# Altium PCB PCB1.PcbDoc (part 3 of 3)
Units mil, origin at the board's own origin, x right, y up, seen from the top; angles counter-clockwise.
Board outline 4173.23 x 3149.71 mil, 2 copper layers (Top Layer, Bottom Layer); 88 components, 73 nets, 388 pads, 166 vias.
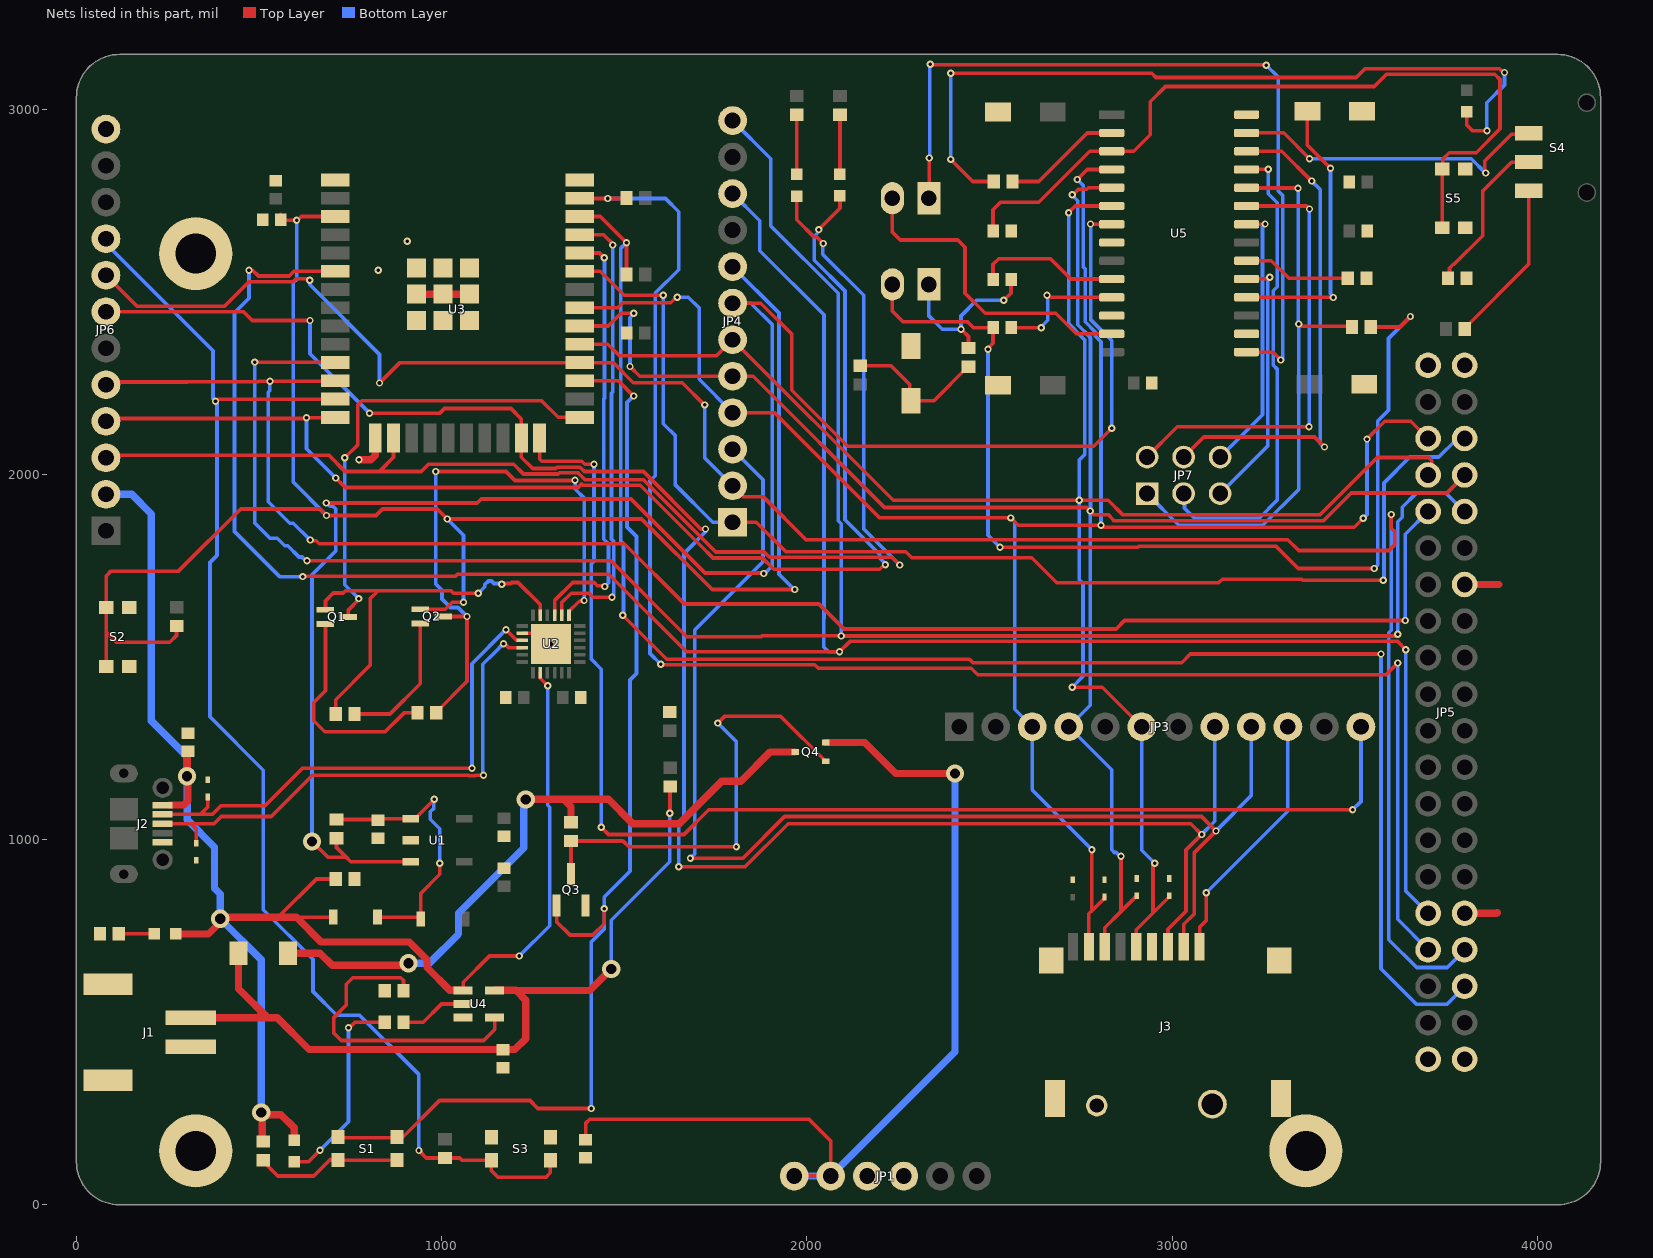
[diagram p2: the nets of this part, all layers, seen from the top]

## Via types
v1: diameter 20, hole 10, Top Layer to Bottom Layer, 146 vias
v2: diameter 50, hole 28, Top Layer to Bottom Layer, 20 vias

## Nets (pads, with @x,y where several pads share a name; then routed paths per layer and width w, separated by ;. In a path a pad name is that pad's centre, name@x,y a point inside that pad or via, vN(x,y) a via of type N, cw(c..) or ccw(c..) an arc to the next point about the centre after c; other vN are vias at no path point) (continued)
CD/DAT3: J3.2 JP3.9 JP4.3 | length 3418.3
  Top Layer w10: v1(1681.1,948.82) 1824.8,948.82 1938.98,1062.99 3080.71,1062.99 v1(3120.08,1023.62) 3061.02,964.57 3061.02,797.24 3031.89,768.11 J3.2@3031.89,706.73
  Bottom Layer w10: v1(1681.1,948.82) 1692.91,960.63 1692.91,1573.47 1880,1760.56 1880,1985.29 JP4.3@1796.63,2068.66 ; v1(3120.08,1023.62) 3216.93,1120.47 JP3.9@3216.93,1309.06
CMD: J3.3 JP3.8 JP6.7 U3.23 | length 5118.5
  Top Layer w10: JP6.7@81.02,2445.2 457.72,2445.2 481.66,2421.26 v1(639.76,2421.26) ; v1(802.6,2167.6) 995.51,2167.6 1007.91,2180 1190,2180 1218.31,2151.69 U3.23@1218.31,2099.17 1218.31,2046.69 1249.25,2015.75 1312.78,2015.75 1315.97,2018.94 1379.5,2018.94 1390.88,2007.56 1552.44,2007.56 1709.61,1850.39 v1(1722.44,1850.39) ; v1(1649.6,925.2) 1830.71,925.2 1948.82,1043.31 3051.18,1043.31 v1(3080.71,1013.78) 3038.19,971.26 3038.19,803.94 2988.58,754.33 J3.3@2988.58,706.73
  Bottom Layer w10: v1(639.76,2421.26) 639.76,2330.44 v1(802.6,2167.6) ; v1(1649.6,925.2) 1649.6,1040.71 1663.39,1054.49 1663.39,1783.39 1722.44,1842.44 v1(1722.44,1850.39) ; v1(3080.71,1013.78) 3116.93,1050 JP3.8@3116.93,1309.06
CTP_/WAKE: JP4.10 JP5.32 U3.6 | length 6513.2
  Top Layer w10: v1(472.44,2559.06) 482.28,2559.06 498.49,2542.84 582.51,2542.84 595.58,2555.91 U3.6@708.66,2555.91 ; v1(620,1720) 621.37,1721.37 1038.39,1721.37 1043.39,1726.37 1457.69,1726.37 1670.14,1513.93 2085.15,1513.93 2089.48,1509.6 v1(2089.48,1513.93) 2118.08,1542.53 3617.47,1542.53 v1(3640,1520)
  Bottom Layer w10: v1(472.44,2559.06) 472.44,2482.06 433.07,2442.69 433.07,1843.3 556.37,1720 v1(620,1720) ; JP4.10@1796.63,2768.66 1871.06,2694.23 1871.06,2612.43 2046.92,2436.57 2046.92,1606.18 2046.06,1605.31 2046.06,1527.16 2059.28,1513.93 v1(2089.48,1513.93) ; v1(3640,1520) 3640,859.03 JP5.32@3700.79,798.24 ; JP5.32@3700.79,797.24 3704.77,801.23 JP5.32@3704.77,811.07
CTP_INT: JP4.2 JP5.33 JP6.8 U3.28 | length 5609.6
  Top Layer w10: JP6.8@81.02,2545.2 166.02,2460.2 405.7,2460.2 472.62,2527.13 593.06,2527.13 600.94,2535 612.5,2535 612.56,2535.06 635.14,2535.06 v1(638.55,2531.65) ; v1(830,2250) 885.91,2305.91 1469.68,2305.91 1524.53,2251.06 1658.94,2251.06 v1(1720,2190) ; JP4.2@1796.63,1968.66 1826.31,1938.98 1879.92,1938.98 1998.43,1820.47 3310.43,1820.47 ; 3307.09,1820.87 3316.93,1820.87 3346.46,1791.34 3593.68,1791.34 3610,1807.65 3610,1842.47 3600,1852.47 v1(3600,1890)
  Bottom Layer w10: v1(638.55,2531.65) 638.55,2519.65 830,2328.2 v1(830,2250) ; v1(1720,2190) 1720,2045.29 JP4.2@1796.63,1968.66 ; v1(3600,1890) 3600,1572.98 3593.34,1566.32 3593.34,725.91 3669.64,649.61 3753.15,649.61 JP5.33@3800.79,697.24
DTR: Q1.2 R8.2 U2.23 | length 1090.6
  Top Layer w10: Q1.2@681.21,1629.41 681.84,1630.04 681.84,1653.45 703.39,1675 730.12,1675 736.49,1681.37 1025.58,1681.37 1032.96,1674 v1(1100,1674) ; R8.2@710.01,1343.8 710.01,1383.05 804.1,1477.14 804.1,1659.1 826.17,1681.17 ; v1(1165,1699) 1166.91,1700.91 1189.62,1700.91 1192.71,1704 1209.39,1704 1269.92,1643.47 U2.23@1269.92,1613.93
  Bottom Layer w10: v1(1100,1674) 1118.21,1692.21 1118.21,1698.21 1128.09,1708.09 1136.37,1708.09 1143.55,1700.91 1163.09,1700.91 v1(1165,1699)
EN: JP4.7 R3.1 U1.3 U5.7 | length 5394.5
  Top Layer w10: v2(645,995) 688,952 738,952 ; v1(683.95,1921.5) 1097.22,1921.5 1108.11,1932.39 1518.68,1932.39 1721.07,1730 1880.24,1730 v1(1881.89,1728.35) ; R3.1@711.98,1007.55 711.98,978.02 738,952 ; U1.3@915.3,939.14 750.86,939.14 738,952 ; JP4.7@1796.63,2468.66 1873.86,2468.66 1958.41,2384.11 1958.41,2230.06 2111.7,2076.77 2785.43,2076.77 v1(2834.65,2125.98) ; v1(2776.7,2685.24) 2776.99,2684.94 2834.35,2684.94 U5.7@2834.65,2684.65
  Bottom Layer w10: v2(645,995) 645,1725 710,1790 710,1905.12 702.93,1912.19 695.96,1912.19 686.66,1921.5 v1(683.95,1921.5) ; JP4.7@1796.63,2468.66 1846.34,2468.66 1905,2410 1905,1748.75 1884.6,1728.35 v1(1881.89,1728.35) ; v1(2776.7,2685.24) 2776.81,2685.12 2776.81,2423.98 2834.65,2366.14 v1(2834.65,2125.98)
ERASE: JP7.3 U5.25 | length 1310.3
  Top Layer w10: U5.25@3203.94,2834.65 3204.15,2834.86 3262.89,2834.86 v1(3263.11,2835.08)
  Bottom Layer w10: JP7.3@3031.5,1947.24 3033.98,1944.76 3033.98,1906.97 3061.02,1879.92 3238.19,1879.92 3287.4,1929.13 3287.4,2288.49 3277.24,2298.66 3277.24,2502.94 3287.71,2513.42 3287.71,2743.88 3263.11,2768.49 v1(3263.11,2835.08)
FT: JP7.6 U5.22 | length 740
  Top Layer w10: U5.22@3203.94,2684.65 3204.31,2685.02 3254.14,2685.02 v1(3254.51,2685.39)
  Bottom Layer w10: JP7.6@3131.5,2047.24 3247.24,2162.99 3247.24,2678.12 v1(3254.51,2685.39)
FWD: JP7.4 U5.26 | length 1376.4
  Top Layer w10: JP7.4@3031.5,2047.24 3086.61,2102.36 3389.76,2102.36 v1(3417.32,2074.8) ; U5.26@3203.94,2884.65 3300.39,2884.65 v1(3381.89,2803.15)
  Bottom Layer w10: v1(3381.89,2803.15) 3405.51,2779.53 3405.51,2083.91 3414.62,2074.8 v1(3417.32,2074.8)
GND: C1.1 C2.1 C3.1 C4.1 C5.1 C6.1 C7.1 C8.1 C9.1 C10.1 C11.1 C12.2 C15.2 C16.1 C17.2 C18.1 C19.2 C20.1 C21.2 C22.1 CR1.1 CR2.1 CR3.1 CR4.1 CR5.1 CR6.1 J1.2 J1.3 J1.4 J2.5 J3.4 J3.10 J3.11 J3.12 J3.13 J3.14 J3.15 JP1.3 JP1.4 JP5.1 JP5.2 JP5.13 JP5.31 JP5.39 JP5.40 JP6.12 MTH1.1 MTH2.1 MTH3.1 Q3.2 R2.1 R4.2 R5.1 R9.2 R20.1 R22.1 S2.1 S2.2 S3.3 S3.4 S5.3 S5.4 U1.2 U2.2 U2.25 U3.1 U3.15 U3.38 U3.39 U3.40 U3.41 U3.42 U3.43 U3.44 U3.45 U3.46 U3.47 U4.3 U5.8 U5.12 U5.16 U5.28 | length 516.3
  Top Layer w10: U2.2@1220.95,1564.97 1269.92,1564.97 v1(1299.45,1535.43)
  Top Layer w20: v1(773.63,2039.81) 806.34,2039.81 818.31,2051.77 U3.15@818.31,2099.17 ; U3.42@931.52,2493.15 U3.43@1003.77,2493.15 U3.44@1076.01,2493.15 ; JP5.31@3800.79,798.24 3888.24,798.24 3890,800 ; JP5.13@3800.79,1698.24 3894.91,1698.24
  other v1: 826.77,2559.06 905.51,2637.8
GPIO0: Q1.3 U3.25 | length 1261.8
  Top Layer w10: v1(735,2045) 770,2080 770,2190 781.54,2201.54 1273.68,2201.54 1319.31,2155.91 U3.25@1377.95,2155.91 ; Q1.3@744.21,1609.72 Q1.3@744.74,1609.72 ; Q1.3@752.21,1609.72 Q1.3@744.74,1609.72 ; v1(772.96,1659.74) 772.96,1657.04 744.74,1628.82 Q1.3@744.74,1609.72
  Bottom Layer w10: v1(735,2045) 735,1697.7 v1(772.96,1659.74)
GPIO2: JP3.12 U3.24 | length 3551.1
  Top Layer w10: U3.24@1268.31,2099.17 1268.31,2041.58 1274.17,2035.72 1383.93,2035.72 1392.09,2027.56 v1(1417.32,2027.56) ; v1(1437.01,1033.46) 1456.69,1013.78 1663.39,1013.78 1730.98,1081.37 v1(3494.09,1081.37)
  Bottom Layer w10: v1(1417.32,2027.56) 1417.32,1762.82 1410,1755.49 1410,1493.46 1437.01,1466.45 v1(1437.01,1033.46) ; v1(3494.09,1081.37) 3516.93,1104.21 JP3.12@3516.93,1309.06
INT: JP5.10 JP6.5 U3.12 | length 4545.7
  Top Layer w10: JP6.5@81.02,2245.2 88.45,2252.64 303.07,2252.64 304.25,2253.82 498.82,2253.82 500,2255 v1(530,2255) U3.12@698.94,2255 ; v1(640,1820) 641.91,1818.09 656.61,1818.09 664.7,1810 1500,1810 1665,1645 2033.12,1645 2101.6,1576.52 2846.77,1576.52 2869.87,1599.62 v1(3638.14,1599.62)
  Bottom Layer w10: v1(530,2255) 528.94,2253.94 528.94,2228.94 525,2225 525,1925 584.04,1865.96 594.04,1865.96 v1(640,1820) ; v1(3638.14,1599.62) 3638.14,1835.6 JP5.10@3700.79,1898.24
INT_READY: S4.3 U5.27 | length 877.2
  Top Layer w10: U5.27@3203.94,2934.65 3204.11,2934.82 3305.33,2934.82 v1(3375.98,2864.17) ; v1(3858.27,2824.8) 3856.35,2826.72 3856.35,2858.49 3929.3,2931.44 S4.3@3966.87,2931.44
  Bottom Layer w10: v1(3375.98,2864.17) 3818.9,2864.17 v1(3858.27,2824.8) v1@3860.24,2824.8
IO14_SW2: JP6.9 R13.1 S3.1 S3.2 U3.13 | length 3678.1
  Top Layer w10: v1(381.06,2200) 383.77,2200 389.68,2205.91 U3.13@708.66,2205.91 ; v1(937.79,148.56) 958.17,128.18 1048.98,128.18 1055.49,121.68 S3.2@1136.08,121.68 1136.08,93.92 1155,75 1285,75 1297.49,87.49 S3.1@1297.49,121.68
  Bottom Layer w10: JP6.9@81.02,2645.2 81.02,2631.24 374.02,2338.24 374.02,2207.05 v1(381.06,2200) ; v1@385,2200 385,1778.01 365.83,1758.84 365.83,1335.95 511.81,1189.97 511.81,808.19 647.97,672.03 647.97,584.03 712.81,519.19 775.06,519.19 937.79,356.45 v1(937.79,148.56)
LEDB: D6.2 JP6.3 U3.16 | length 3559.7
  Top Layer w10: JP6.3@81.02,2045.2 88.45,2052.64 690.65,2052.64 735.41,2007.87 829.65,2007.87 ; U3.16@868.31,2099.17 868.31,2046.53 829.65,2007.87 ; D6.2@1972.44,2761.87 1972.44,2696.85 2019.23,2650.06 2027.01,2650.06 v1(2045.02,2632.05) ; v1(2253.94,1751.65) 2232.87,1772.72 1897.92,1772.72 1883.32,1787.31 1750.56,1787.31 1552.87,1985 1392.22,1985 1373.28,2003.94 1322.18,2003.94 1318.99,2000.75 1224.25,2000.75 1197.13,2027.87 963.83,2027.87 943.83,2007.87 829.65,2007.87
  Bottom Layer w10: v1(2045.02,2632.05) 2043.62,2630.65 2043.62,2602.05 2155.51,2490.16 2155.51,1850.08 v1(2253.94,1751.65)
LEDV: D5.2 JP6.4 U3.14 | length 3578.5
  Top Layer w10: JP6.4@81.02,2145.2 88.45,2152.64 624.93,2152.64 627.29,2155 v1(630,2155) U3.14@693.66,2155 ; U3.14@708.66,2155.91 U3.14@730.66,2155.91 ; v1(710,1990) 736.06,1963.94 1373.28,1963.94 1382.68,1973.33 1386.01,1970 1543.78,1970 1707.72,1806.06 1743.03,1770.75 1878.67,1770.75 1909.42,1740 2199.58,1740 2212.29,1752.72 v1(2215,1752.72) ; v1(2032.48,2670.06) 2090.55,2728.13 D5.2@2090.55,2762.64
  Bottom Layer w10: v1(630,2155) 630,2070 v1(710,1990) ; v1@2035.43,2669.29 2035.43,2666.59 2020.43,2651.59 2020.43,2585.87 2104.49,2501.81 2104.49,1875.51 2199.93,1780.07 2199.93,1770.49 2215,1755.42 v1(2215,1752.72)
Lipo+: C8.2 F1.1 J1.1 R1.2 U4.5 | length 2228.6
  Top Layer w10: v1@1625.3,1073.17 R1.2@1625.3,1144.65
  Top Layer w20: J1.1@313.2,511.81 523.62,511.81 ; F1.1@443.9,688.98 443.9,591.54 523.62,511.81 ; U4.5@1145.26,587.25 1202.75,587.25 1203.39,586.61 ; v2(1464.57,645.67) 1405.51,586.61 1203.39,586.61 ; v1(1624.57,1072.43) v1@1625.3,1073.17 ; R1.2@1625.3,1144.65 R1.2@1626.04,1145.39 ; 523.62,511.81 550.24,511.81 637.05,425 1200,425 1230,455 1230,560 1203.39,586.61
  Bottom Layer w10: v2(1464.57,645.67) 1464.57,779.05 1624.57,939.05 v1(1624.57,1072.43)
MISO: CR4.2 J3.8 JP3.3 JP4.4 JP5.6 U3.31 U5.4 | length 5370.5
  Top Layer w10: U3.31@1377.95,2455.91 1482.35,2455.91 1496.45,2470 1627.29,2470 1642.29,2485 v1(1645,2485) ; JP4.4@1796.63,2168.66 1911.34,2168.66 2199.33,1880.67 v1(2558.09,1880.67) 2578.52,1860.24 v1(2805.12,1860.24) v1@2806.74,1861.86 ; v1(2740.16,2807.09) 2767.44,2834.37 2834.37,2834.37 U5.4@2834.65,2834.65 ; J3.8@2772.05,706.73 2772.05,796.73 2780.4,805.08 ; v1(2780.4,972.47) 2780.4,805.08 ; v1@2806.74,1855.12 3498.82,1855.12 v1(3523.62,1879.92) ; CR4.2@2814.96,842.64 2814.96,839.64 2780.4,805.08 ; v1(3533.46,2096.46) 3582.01,2145 3653.03,2145 JP5.6@3700.79,2097.24
  Bottom Layer w10: v1(1645,2485) 1675.28,2485 1705,2455.28 1705,2260.29 JP4.4@1796.63,2168.66 ; v1(2558.09,1880.67) 2568.9,1869.86 2568.9,1357.09 JP3.3@2616.93,1309.06 2616.93,1135.94 v1(2780.4,972.47) ; v1(2740.16,2807.09) 2756.7,2790.55 2756.7,2567.79 2761.81,2562.67 2761.81,2417.76 2790.32,2389.26 2790.32,2377.8 2805.12,2363 v1(2805.12,1860.24) ; v1(3523.62,1879.92) 3533.46,1889.76 v1(3533.46,2096.46)
MOSI: CR3.2 J3.7 JP3.4 JP4.5 JP5.7 U3.30 U5.5 | length 5189.3
  Top Layer w10: U3.30@1377.95,2405.91 1455.91,2405.91 1490.94,2440.94 v1(1525.59,2440.94) ; v1(1515.75,2295.28) 1542.36,2268.66 JP4.5@1796.63,2268.66 1853.28,2268.66 2212.81,1909.13 2766.06,1909.13 v1(2775.59,1899.61) 2785.43,1889.76 2824.8,1889.76 2838.77,1875.8 ; v1(2726.38,2765.75) 2729.08,2765.75 2743.82,2780.48 2765.88,2780.48 2770.22,2784.82 2834.47,2784.82 U5.5@2834.65,2784.65 ; J3.7@2815.16,706.93 J3.7@2815.36,706.73 2815.36,758.27 2860.03,802.94 ; 2838.77,1872.44 3413.91,1872.44 3490.29,1948.82 3752.36,1948.82 JP5.7@3800.79,1997.24 ; v1(2860.03,954.7) 2860.03,802.94 ; CR3.2@2903.54,846.46 2903.54,843.46 2902.54,842.46 2899.54,842.46 2860.03,802.94
  Bottom Layer w10: v1(1515.75,2295.28) 1515.75,2428.4 1525.59,2438.24 v1(1525.59,2440.94) ; v1(2726.38,2765.75) 2726.38,2764.33 2741.7,2749.01 2741.7,2409.72 2775.32,2376.1 2775.32,2373.09 2776.5,2371.91 2776.5,1900.51 v1(2775.59,1899.61) 2775.59,1367.72 JP3.4@2716.93,1309.06 2834.65,1191.34 2834.65,971.74 2841.72,964.67 2847.35,964.67 2857.32,954.7 v1(2860.03,954.7)
NetC1_2: C1.2 JP1.1 JP1.2 Q4.2 | length 2665.4
  Top Layer w10: C1.2@1395,179.61 1395,224.14 1405.22,234.36 2005.79,234.36 2065.35,174.8 JP1.2@2065.35,78.74 JP1.1@1965.35,78.74
  Top Layer w20: Q4.2@2051.5,1265.59 2158.84,1265.59 2243.33,1181.1 v2(2405.51,1181.1)
  Bottom Layer w20: JP1.1@1965.35,78.74 JP1.2@2065.35,78.74 ; JP1.2@2074.02,81.89 2074.02,87.4 2405.51,418.9 v2(2405.51,1181.1)
NetC4_2: C4.2 D1.1 D3.1 R3.2 U1.1 | length 774
  Top Layer w10: R3.2@711.98,1054.79 C4.2@823.88,1054.79 ; D3.1@824.72,787.4 937.91,787.4 D1.1@942.56,782.75 942.56,852.56 995,905 v1(995,935) ; C4.2@825.64,1053.04 829.86,1057.25 927.3,1057.25 v1(980,1110)
  Bottom Layer w10: v1(980,1110) 978.09,1108.09 978.09,1085.01 969,1075.92 969,1055.55 995,1029.55 v1(995,935)
NetC12_1: C12.1 R16.1 R17.2 | length 399.1
  Top Layer w10: R16.1@2145.67,2297.24 2230.32,2297.24 2281.49,2246.07 2281.49,2205.1 C12.1@2285.09,2201.5 2347.78,2201.5 2440.65,2294.36 R17.2@2442.61,2294.36
NetC13_1: C13.1 U5.10 | length 394.9
  Top Layer w10: C13.1@2509.78,2533.96 2509.78,2574.78 2525,2590 2666.78,2590 2722.13,2534.65 U5.10@2834.65,2534.65
NetC13_2: C13.2 J4.1 R17.1 | length 487.4
  Top Layer w10: v1(2421.95,2397.04) 2422.85,2397.04 2442.61,2377.27 R17.1@2442.61,2345.54 ; v1(2539.37,2476.38) 2558.99,2496 C13.2@2558.99,2533.96
  Bottom Layer w10: J4.1@2334.05,2519.92 2334.05,2433.66 2370.68,2397.04 v1(2421.95,2397.04) 2421.95,2433.76 2464.57,2476.38 v1(2539.37,2476.38)
NetC14_1: C14.1 U5.11 | length 358.9
  Top Layer w10: C14.1@2558.99,2401.57 v1(2641.73,2401.57) ; v1(2657.48,2490.16) 2660.19,2490.16 2665.7,2484.65 U5.11@2834.65,2484.65
  Bottom Layer w10: v1(2641.73,2401.57) 2641.73,2404.28 2659.39,2421.94 2659.39,2488.24 v1(2657.48,2490.16)
NetC14_2: C14.2 J4.2 R18.1 | length 2890.1
  Top Layer w10: J4.2@2234.05,2519.92 2234.05,2447.05 2263.78,2417.32 2440.17,2417.32 2455.92,2401.57 C14.2@2509.78,2401.57 2509.78,2358.94 2496.06,2345.23 v1(2496.06,2342.52) ; v1(2528.67,1800.24) 2906.34,1800.24 2909.25,1803.15 3284.21,1803.15 3345.24,1742.13 v1(3553.15,1742.13) ; R18.1@3544,2403.36 3623.83,2403.36 v1(3652.4,2431.93)
  Bottom Layer w10: v1(2496.06,2342.52) 2496.06,1832.85 v1(2528.67,1800.24) ; v1(3553.15,1742.13) 3562.99,1751.97 3562.99,2145.67 3592.52,2175.2 3592.52,2372.05 v1(3652.4,2431.93)
NetC15_1: C15.1 U5.18 | length 776.3
  Top Layer w10: U5.18@3203.94,2484.65 3204.14,2484.45 3440.75,2484.45 v1(3440.94,2484.25) ; C15.1@3370.2,2994.08 3370.2,2901.68 v1(3433.79,2838.09)
  Bottom Layer w10: v1(3433.79,2838.09) 3433.79,2494.11 3440.94,2486.96 v1(3440.94,2484.25)
NetCR1_2: CR1.2 J2.3 U2.4 | length 1434.4
  Top Layer w10: J2.3@236.22,1043.31 313.7,1043.31 ; CR1.2@328.61,989.9 328.61,1028.39 313.7,1043.31 ; v1(1114.8,1175.84) 1091.97,1175.84 1091.31,1175.18 1074.74,1175.18 1074.08,1175.84 646.21,1175.84 570.47,1100.1 533.37,1062.99 396.72,1062.99 377.04,1043.31 313.7,1043.31 ; v1(1169.56,1536.48) 1172.27,1536.48 1183.17,1525.59 U2.4@1220.95,1525.59
  Bottom Layer w10: v1(1114.8,1175.84) 1112.88,1177.75 1112.88,1479.81 1144.67,1511.59 v1(1169.56,1536.48)
NetCR2_2: CR2.2 J2.2 U2.3 | length 1430.4
  Top Layer w10: J2.2@236.22,1068.9 340,1068.9 ; CR2.2@360,1116.5 360,1088.9 340,1068.9 ; v1(1083.02,1195.18) 619.04,1195.18 516.44,1092.58 395.99,1092.58 372.31,1068.9 340,1068.9 ; v1(1176.42,1574.81) 1176.42,1574.35 1205.5,1545.28 U2.3@1220.95,1545.28
  Bottom Layer w10: v1(1083.02,1195.18) 1083.02,1481.41 v1(1176.42,1574.81)
NetD2_2: D2.2 R4.1 | length 97.3
  Top Layer w10: R4.1@115.69,741.68 D2.2@212.98,741.68
NetD4_2: D4.2 R10.1 | length 557.4
  Top Layer w10: D4.2@596.08,117.9 635.31,117.9 v1(667.08,149.67) ; v1(745,485) 747.71,485 762.71,500 R10.1@844.41,500
  Bottom Layer w10: v1(667.08,149.67) 745,227.59 v1(745,485)
NetD5_1: D5.1 R14.1 | length 164.5
  Top Layer w10: R14.1@2090.55,2984.25 2090.55,2823.88 D5.1@2093.5,2820.92
NetD6_1: D6.1 R15.1 | length 163.3
  Top Layer w10: D6.1@1972.44,2820.93 R15.1@1972.44,2984.25
NetD7_2: D7.2 R19.2 | length 2191.6
  Top Layer w10: v1(2393.7,2862.2) 2454.23,2801.67 R19.2@2511.55,2801.67 ; v1(2393.7,3098.43) 2944.18,3098.43 2955.99,3086.61 3503.76,3086.61 3527.15,3110 3897.29,3110 3907.29,3100 v1(3910,3100) ; D7.2@3806.78,2992.5 3806.82,2956.45 3822.32,2940.94 v1(3862.2,2940.94)
  Bottom Layer w10: v1(2393.7,2862.2) v1(2393.7,3098.43) ; v1(3862.2,2940.94) 3861.25,2941.89 3861.25,3017.13 3910,3065.87 v1(3910,3100)
NetF1_2: F1.2 Q4.3 R24.2 | length 1879.4
  Top Layer w20: F1.2@579.72,688.98 666.98,688.98 700.41,655.54 903.92,655.54 v2(909.45,661.06) ; v2(1230.36,1109.38) 1231.23,1110.24 1333.95,1110.24 ; R24.2@1354.33,1047.24 1354.33,1089.87 1333.95,1110.24 ; Q4.3@1968.5,1240 1900,1240 1819.8,1159.8 1767,1159.8 1650.51,1043.31 1523.62,1043.31 1456.69,1110.24 1333.95,1110.24
  Bottom Layer w20: v2(909.45,661.06) 966.02,661.06 1046.13,741.17 1046.13,798.1 1224.83,976.8 1224.83,1103.84 v2(1230.36,1109.38)
NetJ3_1: J3.1 JP3.10 | length 702.5
  Top Layer w10: J3.1@3075.2,706.73 3075.2,760 3093.36,778.16 v1(3093.36,854.25)
  Bottom Layer w10: v1(3093.36,854.25) 3316.93,1077.82 JP3.10@3316.93,1309.06
NetJ5_1: J5.1 U5.15 | length 2219.2
  Top Layer w10: J5.1@2334.05,2756.14 2334.65,2756.74 v1(2334.65,2866.14) ; v1(2337.9,3122.56) 2339.14,3121.32 3256.63,3121.32 v1(3257.87,3120.08) ; U5.15@3203.94,2334.65 3275.58,2334.65 v1(3297.24,2312.99)
  Bottom Layer w10: v1(2334.65,2866.14) 2336.27,2867.77 2336.27,3120.93 v1(2337.9,3122.56) ; v1(3257.87,3120.08) 3290.38,3087.57 3290.38,2775.59 3302.71,2763.26 3302.71,2318.46 v1(3297.24,2312.99)
NetJ5_2: J5.2 U5.13 | length 905.5
  Top Layer w10: J5.2@2234.05,2756.14 2234.05,2663.59 2255.91,2641.73 2413.39,2641.73 2433.07,2622.05 2433.07,2496.06 2488.19,2440.94 2681.1,2440.94 2737.4,2384.65 U5.13@2834.65,2384.65 U5.13@2857.68,2384.65
NetQ1_1: Q1.1 R7.1 | length 597.3
  Top Layer w10: Q1.1@679.49,1590.04 682.14,1587.38 682.14,1407.14 650,1375 650,1325 680,1295 845.23,1295 896.98,1346.75 R7.1@933.94,1346.75
NetQ2_1: Q2.1 R8.1 | length 379.4
  Top Layer w10: R8.1@761.19,1343.8 858.8,1343.8 941.65,1426.65 941.65,1590.83 Q2.1@941.97,1591.15
NetQ3_3: Q3.3 Q4.1 R24.1 | length 1247.9
  Top Layer w10: Q3.3@1354.33,921.26 R24.1@1354.33,996.06 1496.32,996.06 1512.07,980.32 v1(1807.09,980.32) ; v1(1755.91,1318.9) 1774.25,1337.24 1928.67,1337.24 Q4.1@2051.5,1214.41
  Bottom Layer w10: v1(1755.91,1318.9) 1807.09,1267.72 v1(1807.09,980.32)
NetR9_1: R9.1 U4.4 | length 836.2
  Top Layer w10: R9.1@895.66,586.47 895.66,614.34 888.4,621.6 756.6,621.6 738.94,603.94 738.94,546.98 705,513.05 705,470 725,450 1115,450 1145.26,480.26 U4.4@1145.26,512.44
NetR10_2: R10.2 U4.2 | length 184.1
  Top Layer w10: R10.2@895.59,500 949.61,500 999.45,549.84 U4.2@1059.02,549.84
NetR19_1: R19.1 U5.2 | length 327
  Top Layer w10: R19.1@2562.73,2801.67 2634.59,2801.67 2767.57,2934.65 U5.2@2834.65,2934.65
NetR20_2: R20.2 U5.20 | length 296.7
  Top Layer w10: U5.20@3203.94,2584.65 3271.65,2584.65 3319.78,2536.52 R20.2@3480.69,2536.52
NetR21_1: R21.1 S4.1 | length 451.2
  Top Layer w10: R21.1@3800.96,2397.78 3800.96,2399.75 3976.03,2574.81 S4.1@3976.03,2776.48
NetR22_2: R22.2 S4.2 | length 438.3
  Top Layer w10: R22.2@3755.13,2536.52 3759.25,2540.65 3759.25,2564.37 3769.68,2574.8 3771.65,2574.8 3850.39,2653.54 3850.39,2775.59 3929.48,2854.68 3975.49,2854.68 S4.2@3976.03,2855.22
NetR23_1: R23.1 S1.1 S1.2 | length 380.7
  Top Layer w10: R23.1@511.81,116.14 513.78,116.14 551.18,78.74 649.67,78.74 694.87,123.95 694.87,121.98 716.02,121.98 856.29,121.98
PLAY: JP7.2 U5.23 | length 1249.9
  Top Layer w10: JP7.2@2931.5,2047.24 3014.17,2129.92 v1(3374.76,2129.92) ; U5.23@3203.94,2734.65 3367.72,2734.65 v1(3375.98,2726.38)
  Bottom Layer w10: v1(3374.76,2129.92) 3375.37,2130.53 3375.37,2725.77 v1(3375.98,2726.38)
REC: JP7.1 R18.2 U5.24 | length 1607.9
  Top Layer w10: U5.24@3203.94,2784.65 3204.84,2783.75 3343.82,2783.75 v1(3344.72,2782.85) ; v1(3346.46,2411.42) 3349.16,2411.42 3355.58,2405 3491.18,2405 R18.2@3492.82,2403.36
  Bottom Layer w10: JP7.1@2931.5,1947.24 3018.5,1860.24 3248.03,1860.24 3346.46,1958.66 v1(3346.46,2411.42) 3345.59,2412.29 3345.59,2781.98 v1(3344.72,2782.85)
RESET: C7.2 JP4.8 Q2.2 R6.1 S2.3 S2.4 U3.3 | length 4899.1
  Top Layer w10: S2.4@81.82,1474.41 81.82,1568.18 ; R6.1@274.95,1584.63 274.26,1583.95 274.26,1558.76 255.51,1540 110,1540 81.82,1568.18 ; C7.2@559.55,2711.91 C7.2@559.55,2696.91 560.98,2695.49 v1(602.85,2695.49) 605.56,2695.49 615.98,2705.91 U3.3@708.66,2705.91 ; Q2.2@941.97,1630.52 1009.83,1630.52 1029.3,1650 v1(1060,1650) v1@1059.36,1649.36 ; v1(1966.46,1684.7) 1740.57,1684.7 1547.4,1877.87 v1(1015,1877.87) 987.87,1905 837.79,1905 820.2,1887.41 v1(684.8,1887.41) 684.62,1887.41 667.04,1905 449.69,1905 279.69,1735 95,1735 81.82,1721.82 81.82,1568.18
  Bottom Layer w10: v1(602.85,2695.49) 602.85,2533.6 593.44,2524.19 593.44,1978.77 v1(684.8,1887.41) ; v1(1015,1877.87) 1060,1832.87 v1(1060,1650) ; JP4.8@1796.63,2568.66 1923.82,2441.47 1923.82,1726.18 1965.3,1684.7 v1(1966.46,1684.7)
RST: C22.2 S5.1 S5.2 U5.3 | length 2172.8
  Top Layer w10: C22.2@2509.78,2666.34 2509.78,2724.62 2530.16,2745 2635,2745 2774.65,2884.65 U5.3@2834.65,2884.65 2894.65,2884.65 2940,2930 2940,3020 2981.61,3061.61 3553.64,3061.61 3587.03,3095 3883.69,3095 3897.63,3081.06 3897.63,2945.85 3832.48,2880.7 3758.66,2880.7 3741.34,2863.39 3741.34,2838.5 S5.2@3739.38,2836.53 S5.1@3739.38,2675.12
RTS: Q2.3 R7.2 U2.19 | length 1601.9
  Top Layer w10: v1(984.25,2007.87) 1176.06,2007.87 1201.06,1982.87 1363.94,1982.87 v1(1365,1983.94) ; R7.2@985.12,1348.72 1069.52,1433.12 v1(1069.52,1610.56) 1069.38,1610.7 1005.11,1610.7 Q2.3@1004.97,1610.84 ; U2.19@1348.68,1613.93 1348.68,1624.93 1376.47,1652.73 1388.09,1652.73 v1(1390,1654.64)
  Bottom Layer w10: v1(984.25,2007.87) 984.25,1699.73 1001.12,1682.87 1001.12,1658.53 1024.15,1635.5 1044.58,1635.5 v1(1069.52,1610.56) ; v1(1365,1983.94) 1366.06,1982.87 1366.06,1958.94 1390,1935 v1(1390,1654.64)
RXD0: U2.21 U3.34 | length 1186.4
  Top Layer w10: U2.21@1309.3,1613.93 1309.3,1654.3 1358.94,1703.94 1416.85,1703.94 1425.96,1694.83 1444.94,1694.83 v1(1446.85,1692.91) ; U3.34@1377.95,2605.91 1432.45,2605.91 1445,2593.36 v1(1445,2593.25)
  Bottom Layer w10: v1(1445,2593.25) 1446.06,2592.19 1446.06,2208.26 1443.94,2206.13 1443.94,1822.35 1456.69,1809.59 1456.69,1702.76 v1(1446.85,1692.91)
SCK: CR5.2 J3.5 JP3.6 JP4.6 JP5.8 U3.29 U5.6 | length 5071
  Top Layer w10: U3.29@1377.95,2355.91 1455.12,2355.91 1486.02,2325 1752.96,2325 JP4.6@1796.63,2368.66 2236.16,1929.13 v1(2746.06,1929.13) 2824.8,1929.13 2864.17,1889.76 3405.51,1889.76 3561.71,2045.96 3702.07,2045.96 3710.63,2037.4 JP5.8@3710.63,1998.03 ; v1(2716.54,2716.54) 2734.65,2734.65 U5.6@2834.65,2734.65 ; v1(2726.38,1417.32) 2808.66,1417.32 JP3.6@2916.93,1309.06 ; J3.5@2901.97,706.73 2901.97,753.3 2992.13,843.46 CR5.2@2992.13,846.46 ; 2947.8,802.13 2947.8,930.08 v1(2952.76,935.04)
  Bottom Layer w10: v1(2716.54,2716.54) 2716.54,2413.67 2732.87,2397.33 2732.87,2395.82 2760.32,2368.38 2760.32,2053.62 2746.06,2039.36 v1(2746.06,1929.13) 2746.06,1710.9 2755.91,1701.06 2755.91,1446.85 v1(2726.38,1417.32) ; JP3.6@2916.93,1309.06 2916.93,970.87 v1(2952.76,935.04)
SCL: JP5.35 R12.1 U3.36 | length 4565.6
  Top Layer w10: U3.36@1377.95,2705.91 1434.09,2705.91 v1(1506,2634) R12.1@1506,2547.12 ; v1(1496.06,1614.17) 1616.31,1493.93 2445.01,1493.93 2454.69,1484.25 3026.19,1484.25 3049.99,1508.06 v1(3571.78,1508.06)
  Bottom Layer w10: v1(1496.06,1614.17) 1497.87,1615.98 1497.87,1809.33 1490,1817.21 1490,2618 v1(1506,2634) ; v1(3571.78,1508.06) 3571.78,646.4 3669.17,549.01 3752.55,549.01 JP5.35@3800.79,597.24
SCS: JP4.1 JP5.5 U3.33 | length 3381.9
  Top Layer w10: U3.33@1377.95,2555.91 1434.09,2555.91 1500,2490 v1(1607.13,2490) ; JP4.1@1796.63,1868.66 1861.65,1868.66 1942.6,1787.72 2270.97,1787.72 2287.04,1771.65 2615.41,1771.65 2684.31,1702.76 3127.22,1702.76 3137.06,1712.6 3354.99,1712.6 3357.74,1709.85 v1(3578.38,1709.85)
  Bottom Layer w10: v1(1607.13,2490) 1607.13,2138.45 1640,2105.58 1640,1970.92 1742.26,1868.66 JP4.1@1796.63,1868.66 ; v1(3578.38,1709.85) 3580,1711.47 3580,1976.46 3650.79,2047.24 3730.32,2047.24 3776.33,2093.26 3796.8,2093.26 JP5.5@3800.79,2097.24
SDA: JP5.34 R11.1 U3.37 | length 4473.3
  Top Layer w10: U3.37@1377.95,2755.91 1378.86,2755 v1(1455,2755) R11.1@1494.41,2755 ; v1(1599.68,1479.99) 1600.75,1478.93 2021.88,1478.93 2031.56,1469.25 2449.98,1469.25 2467.97,1451.26 3585.74,1451.26 3617.58,1483.1 v1(3617.58,1483.46)
  Bottom Layer w10: v1(1455,2755) 1612.99,2755 1648.94,2719.06 1648.94,2560.1 1585,2496.16 1585,1996.02 1570.54,1981.55 1570.54,1509.14 v1(1599.68,1479.99) ; v1(3617.58,1483.46) 3617.58,781.45 JP5.34@3700.79,698.24 JP5.34@3700.79,697.24
STAYON: Q3.1 S1.3 S1.4 U3.27 | length 3162.2
  Top Layer w10: S1.4@716.02,184.97 717.44,183.54 892.2,183.54 994.09,285.43 1241.78,285.43 1263.43,263.78 v1(1409.45,263.78) ; Q3.1@1314.74,807.41 1314.74,775.26 1351.44,738.56 1413.87,738.56 1444.88,769.57 v1(1444.88,811.02) ; U3.27@1377.95,2255.91 1484.25,2255.91 v1(1525.59,2214.57)
  Bottom Layer w10: v1(1409.45,263.78) 1409.45,719.72 1444.88,755.16 v1(1444.88,811.02) 1444.88,842.52 1515.75,913.39 1515.75,1437.01 1533.57,1454.83 1533.57,1829.99 1507.61,1855.95 1507.61,2196.59 v1(1525.59,2214.57)
TXD0: U2.20 U3.35 | length 1264.3
  Top Layer w10: U2.20@1328.99,1613.93 1328.99,1648.99 1354.64,1674.64 1403.61,1674.64 1414.86,1663.39 v1(1466.54,1663.39) ; U3.35@1377.95,2655.91 1443.48,2655.91 1468.91,2630.48 v1(1468.91,2627.93)
  Bottom Layer w10: v1(1466.54,1663.39) 1466.54,1663.94 1465,1665.47 1471.69,1672.17 1471.69,1815.81 1465,1822.5 1465,2221.91 1468.91,2225.82 v1(1468.91,2627.93)
VOL: JP7.5 U5.19 | length 714.3
  Top Layer w10: U5.19@3203.94,2534.65 3204.54,2535.25 3263.59,2535.25 v1(3267.71,2539.36)
  Bottom Layer w10: JP7.5@3131.5,1947.24 3262.24,2077.99 3262.24,2533.89 v1(3267.71,2539.36)
VUSB: C11.2 D2.1 D3.2 D4.1 J2.1 JP6.2 R5.2 R23.2 U2.8 U4.1 | length 4551.2
  Top Layer w10: v2(393.84,783.45) 393.84,780.92 v2@397.38,777.38 ; 551.98,786.98 657.23,892.23 R5.2@710.01,892.23 ; 602.4,787.4 D3.2@703.05,787.4 ; U4.1@1059.02,587.25 1059.02,609.02 1131.1,681.1 v1(1212.6,681.1) ; U2.8@1269.92,1456.93 1269.92,1441.48 v1(1290.58,1420.83)
  Top Layer w20: J2.1@253.72,1094.49 293.72,1094.49 305.44,1106.2 305.44,1167.64 v2@303.13,1169.95 ; D2.1@272.03,741.68 361.68,741.68 v2@397.38,777.38 ; v2(303.04,1173.56) 303.68,1174.21 C11.2@303.68,1240.68 ; v2(393.84,783.45) 397.38,786.98 551.98,786.98 602.82,786.98 ; v2(505.98,252.65) v2@508.9,249.74 ; R23.2@511.81,173.23 508.9,176.14 v2@508.9,249.74 ; D4.1@596.08,176.96 596.08,211 560.17,246.91 511.72,246.91 v2@508.9,249.74 ; 602.4,787.4 602.82,786.98 ; U4.1@1059.02,587.25 1022.41,587.25 959.88,649.78 959.88,671.27 911.88,719.27 670.53,719.27 602.82,786.98
  Bottom Layer w10: v1(1212.6,681.1) 1295.75,764.26 1295.75,1088.6 1290.58,1093.78 v1(1290.58,1420.83)
  Bottom Layer w20: JP6.2@81.02,1945.2 151.26,1945.2 205,1891.46 205,1325 303.13,1226.87 303.13,1053.88 378.36,978.64 378.36,866.28 393.84,850.8 v2(393.84,783.45) ; v2@397.38,779.91 505.98,671.31 v2(505.98,252.65)
WAIT: JP4.12 JP5.9 U3.11 | length 6019.2
  Top Layer w10: v1(488.45,2307.3) 707.27,2307.3 U3.11@708.66,2305.91 ; v1(631.3,1763.03) 1463.46,1763.03 1671.18,1555.32 1874.89,1555.32 1877.28,1557.7 2093.77,1557.7 v1(2094.26,1557.21) ; v1@2096.31,1561.52 2096.31,1560.1 2098.88,1557.53 3610.13,1557.53 3615.13,1562.53 v1(3617.83,1562.53)
  Bottom Layer w10: v1(488.45,2307.3) 488.45,1866.55 530.09,1824.91 549.93,1824.91 570.66,1804.18 578.92,1804.18 609.44,1773.67 617.96,1773.67 628.59,1763.03 v1(631.3,1763.03) ; JP4.12@1796.63,2968.66 1901.06,2864.23 1901.06,2680.08 2085.67,2495.48 2085.67,1873.12 2094.26,1864.52 v1(2094.26,1557.21) ; v1(3617.83,1562.53) 3617.64,1562.73 3617.64,1870 3630,1882.36 3630,1910 3668.82,1948.82 3749.21,1948.82 JP5.9@3800.79,1897.24
pads on no net: J2.4 J2.6 J2.7 J2.8 J2.9 J2.S_1 J2.S_2 JP3.1 JP3.5 JP3.7 JP3.11 JP5.11 JP5.12 JP5.15 JP5.16 JP5.17 JP5.18 JP5.19 JP5.20 JP5.21 JP5.22 JP5.23 JP5.24 JP5.25 JP5.26 JP5.27 JP5.28 JP5.29 JP5.30 JP5.36 S4.MH U1.5 U2.1 U2.9 U2.10 U2.11 U2.12 U2.13 U2.14 U2.15 U2.16 U2.17 U2.18 U2.22 U2.24 U3.17 U3.18 U3.19 U3.20 U3.21 U3.22 U3.32 U5.9 U5.17

## Polygon pours and split planes (outlines as drawn)
GND on Bottom Layer "GNDBOT" (solid, pour order 1): 0,0 0,3150 425,3150 425,2830 430,2825 1650,2825 1650,3150 4173.23,3150 4173.23,0
GND on Top Layer "GNDTOP" (solid, pour order 0): 5.7,0 5.7,3150 430.7,3150 430.7,2830 1655.7,2830 1655.7,3150 4178.93,3150 4178.93,0

## Keep-outs
Keep-Out Layer:
  rectangle: 3650,450 3850,2250
  lines w10: 0,118.11 ccw(c118.11,118.11) 118.11,0 4055.12,0 ccw(c4055.12,118.11) 4173.23,118.11 4173.23,3031.5 ccw(c4055.12,3031.5) 4055.12,3149.61 118.11,3149.61 ccw(c118.11,3031.5) 0,3031.5 0,118.11

## Silkscreen, mask and mechanical layers (free items; w line width, h text height)
Mechanical 1:
  the board outline again, w10

## Text inside footprints (layer, text, board x,y; h text height)
CR1: Top Overlay "*" at 353.61,906.4 h52 r90; Mechanical 13 "*" at 353.61,947.4 h50 r90
CR2: Top Overlay "*" at 335,1200 h52 r270; Mechanical 13 "*" at 335,1159 h50 r270
CR3: Top Overlay "*" at 2878.54,929.96 h52 r270; Mechanical 13 "*" at 2878.54,888.96 h50 r270
CR4: Top Overlay "*" at 2789.96,926.14 h52 r270; Mechanical 13 "*" at 2789.96,885.14 h50 r270
CR5: Top Overlay "*" at 2967.13,929.96 h52 r270; Mechanical 13 "*" at 2967.13,888.96 h50 r270
CR6: Top Overlay "*" at 2703.04,926.13 h52 r270; Mechanical 13 "*" at 2703.04,885.13 h50 r270
U2: Top Overlay "*" at 1167.45,1569.5 h52; Mechanical 13 "*" at 1224.45,1569.5 h50
U4: Top Overlay "*" at 1036.52,604.25 h52; Mechanical 13 "*" at 1073.14,553.84 h50